# Altium PCB USB_Board.PcbDoc
Units mm, origin at the board's own origin, x right, y up, seen from the top; angles counter-clockwise.
Board outline 20.1 x 44.5 mm, 2 copper layers (Top Layer, Bottom Layer); 29 components, 34 nets, 179 pads, 17 vias.
Unrouted connection lines stored in the file: 1.
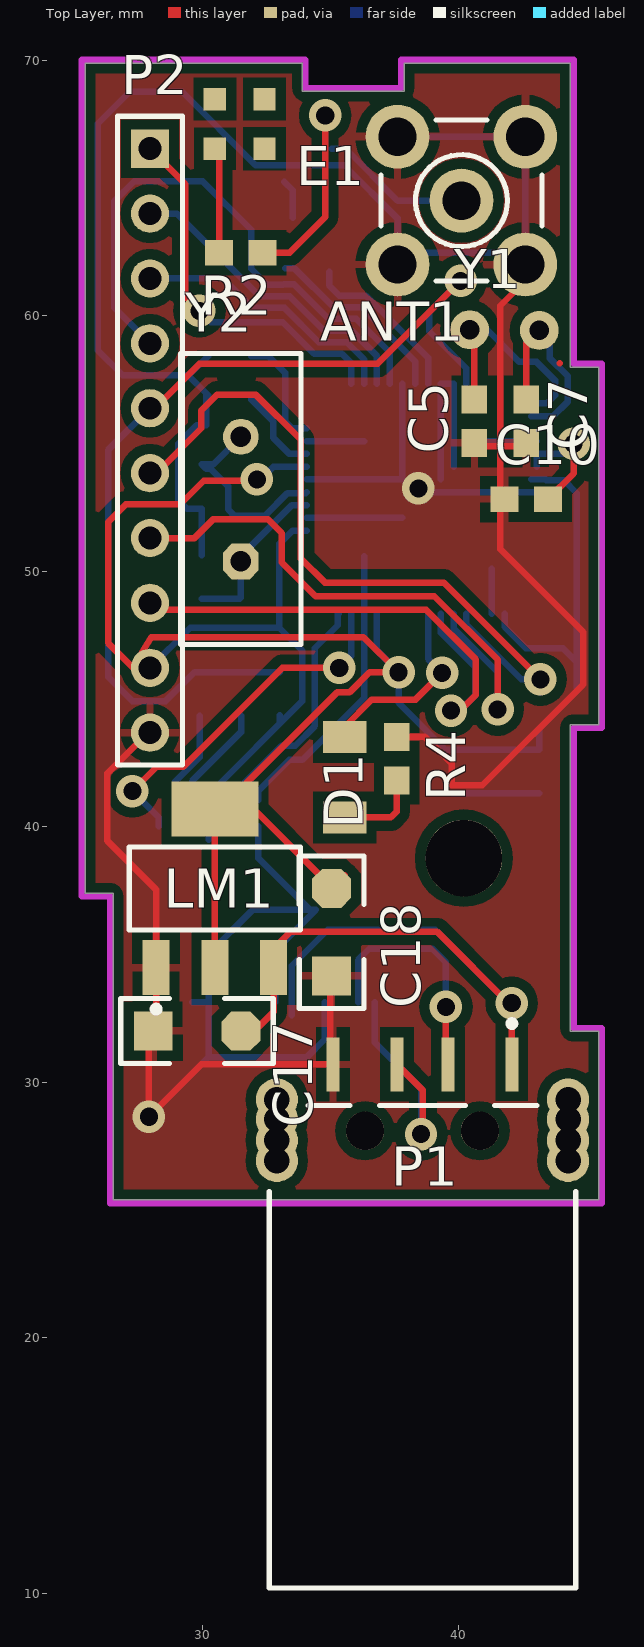
[diagram p0: Top Layer view]
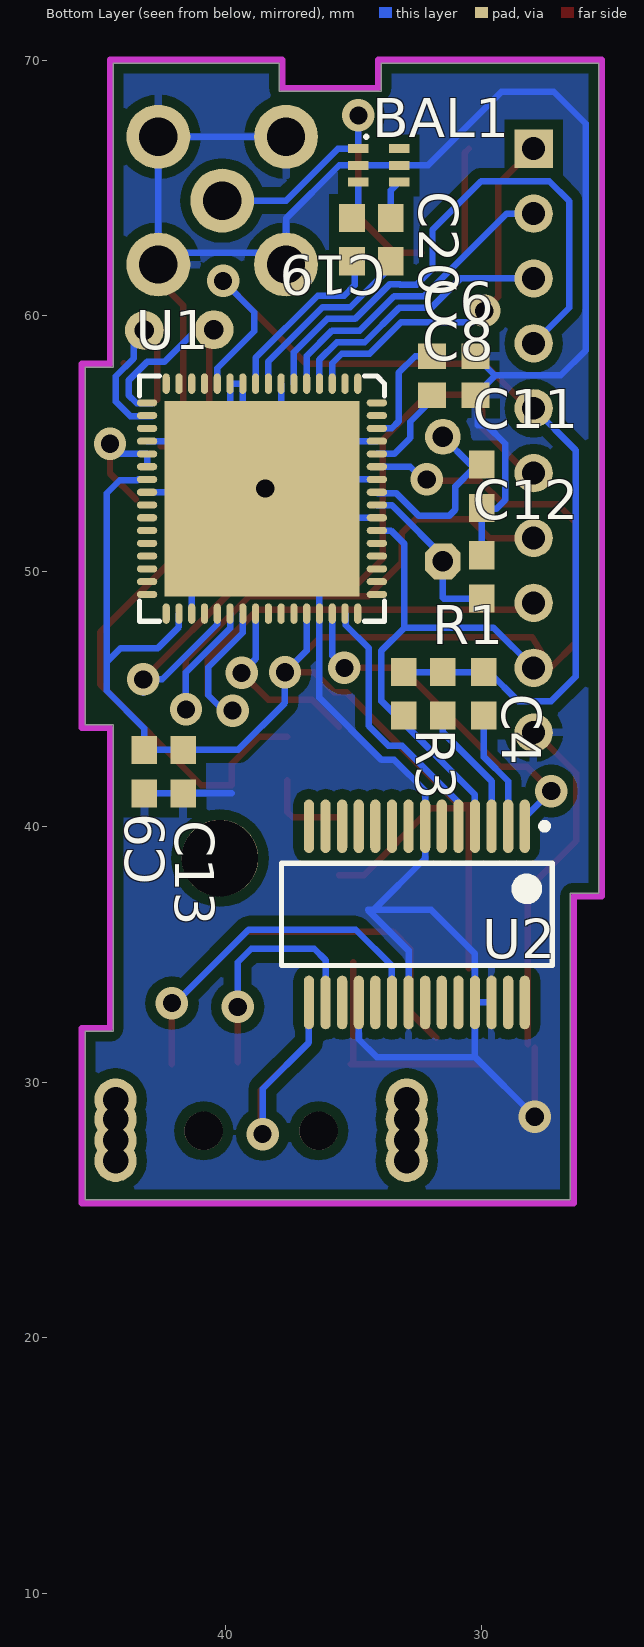
[diagram p1: Bottom Layer view, seen from below]

## Layer stack, top to bottom
Top Layer: signal copper 0.0356
Dielectric: dielectric 0.32, FR-4, Dk 4.8
Bottom Layer: signal copper 0.0356

## Board outline
26.5,25.4 45.5,25.4 45.5,32 44.4,32 44.4,44 45.5,44 45.5,58 44.4,58 44.4,69.9 37.9,69.9 37.9,68.8 33.9,68.8 33.9,69.9 25.4,69.9 25.4,37.4 26.5,37.4

## Design rules (kind name [scope] priority, off if disabled: settings)
Clearance polygon [inpolygon] p1: gap=0.4
Clearance [All] p2: gap=0.2
ComponentClearance [All] p1 off: gap=0.254 collisioncheckmode=3 verticalgap=0.254 showdistances=FALSE
HoleSize [All] p1 off: absolutevalues=TRUE maxlimit=2.54 minlimit=0.025 maxpercent=80.000 minpercent=20.000
MinimumSolderMaskSliver [All] p1 off: minsoldermaskwidth=0.254
PolygonConnect PolygonConnect_1 [isVia] p1: connectstyle=Direct reliefconductorwidth=0.254 reliefentries=4 polygonreliefangle="90 Angle"
PolygonConnect [All] p2: connectstyle=Relief reliefconductorwidth=0.3 reliefentries=4 polygonreliefangle="90 Angle"
RoutingVias [All] p1: holewidth=0.6 width=1 viastyle="Through Hole" minholewidth=0.711 minwidth=1.27 maxholewidth=0.711 maxwidth=1.27
SilkToSilkClearance [All] p1 off: silktosilkclearance=0.254
SilkscreenOverComponentPads [All] p1 off: minsilkscreentomaskgap=0.254
SolderMaskExpansion [All] p1: expansion=0.102
UnRoutedNet [All] p1 off:
Width [All] p1: maxlimit=0.3 minlimit=0.2 preferedwidth=0.2
22 further rules are at their usual default settings.

## Components (designator, comment, footprint, x,y, rotation, side; value= is the part's Value field where it differs from the comment)
ANT1 "SMB" SMB_V-RJ45 40.132,64.516 r0 top
BAL1 "2.45 GHz" BALUN_SMD 34.8,66.548 r90 bottom
C4 "Cap" 1608[0603] 29.885,45.208 r90 bottom
C5 "Cap" 1608[0603] 40.64,55.88 r270 top
C6 "Cap" 1608[0603] 31.064,58.426 r180 bottom
C7 "Cap" 1608[0603] 42.672,55.88 r270 top
C8 "Cap" 1608[0603] 31.064,56.902 r180 bottom
C9 "Cap" 1608[0603] 43.18,42.164 r270 bottom
C10 "Cap" 1608[0603] 42.672,52.832 r0 top
C11 "Cap" 1608[0603] 29.972,53.34 r90 bottom
C12 "Cap" 1608[0603] 29.972,49.784 r270 bottom
C13 "Cap" 1608[0603] 41.656,42.164 r270 bottom
C17 "Cap Pol1" Minitantalo 31.496,32.004 r270 top
C18 "Cap Pol1" Minitantalo 35.052,37.592 r0 top
C19 "Cap" 1608[0603] 35.052,62.992 r90 bottom
C20 "Cap" 1608[0603] 33.528,62.992 r90 bottom
D1 "TX" 3015[1206] 35.56,43.522 r270 top
E1 "Antenna" "Antennas 2.4G SMD MOLEX" 30.48,66.548 r0 top
LM1 "LM1117" LM1117 30.48,37.592 r180 top
P1 "USB Type A" USBA_SMD 38.608,25.4 r270 top locked
P2 "Header 10" HDR1X10 27.94,66.548 r270 top
R1 "Res2" 1608[0603] 33.02,45.212 r270 bottom
R2 "Res2" 1608[0603] 31.496,62.484 r0 top
R3 "Res2" 1608[0603] 31.505,45.208 r270 bottom
R4 "Res2" 1608[0603] 37.592,42.672 r90 top
U1 "ATmega128RFA1-DE" MLF64-M2 38.575,52.85 r90 bottom
U2 "IC_FT232RL" SSOP-28 32.512,36.576 r270 bottom
Y1 "32.768KHz" Crystal 43.18,59.436 r180 top
Y2 "16MHz" BCY-W2/E4.7 31.496,52.832 r90 top

## Footprints (in the part's own frame and the unit in brackets; to place one, negate y for a bottom-side part, rotate by r counter-clockwise, add the part's x,y. Pads: shape width x height; smd on the part's side, far side on the other; paste and mask are expansions set on the pad)
1608[0603] [mm] "Chip Capacitor; Body 1.6 x 0.8 mm (LxW typ)"
  rect 1.1x1 smd: 1(-0.85,0) 2(0.85,0)
  body extent -1,-0.5 0.9,0.5, height 1.3
3015[1206] [mm] "Chip Capacitor; Body 3.0 x 1.5 mm (LxW typ)"
  rect 1.25x1.7 smd: 1(0,0) 2(3.15,0)
  body extent 0,-0.9 3.15,0.9, height 1.3
"Antennas 2.4G SMD MOLEX" [mm]
  rect 0.87x0.87 smd mask+0.335: 1(0,0) ""(0,1.94) ""(1.94,0) ""(1.94,1.94)
BALUN_SMD [mm] "Harmonic Filter-Balun; Body 2.0 x 1.25 mm"
  rect 0.35x0.8 smd: 1(0,0) 2(-0.65,0) 3(-1.3,0) 4(-1.3,-1.6) 5(-0.65,-1.6) 6(0,-1.6)
  silkscreen extent 0.48,-0.3 0.48,-0.3, body extent -1.65,-1.43 0.35,-0.18, height 0.8
BCY-W2/E4.7 [mm] "Quartz Crystal, Thru-Hole; 2 Leads; Body 11.35 x 4.65 x 13.46 mm (LxWxH max)"
  oct 1.4x1.4 hole 0.8: 1(-2.44,0)
  round 1.4 hole 0.8: 2(2.44,0)
  silkscreen extent -5.7,-2.35 5.7,2.35
Crystal [mil]
  round 60 hole 30: 1(0,0) 2(107.28,-0.98)
HDR1X10 [mm] "Connector; Header; 10 Position"
  rect 1.5x1.5 hole 0.9: 1(0,0)
  round 1.5 hole 0.9: 2(2.54,0) 3(5.08,0) 4(7.62,0) 5(10.16,0) 6(12.7,0) 7(15.24,0) 8(17.78,0) 9(20.32,0) 10(22.86,0)
  silkscreen extent -1.27,-1.27 24.13,1.27
LM1117 [mm]
  rect 1.05x2.15 smd: 1(2.3,3.1) 2(0,3.1) 3(-2.3,3.1)
  rect 3.4x2.15 smd: 2(0,-3.1)
  silkscreen extent -3.35,-1.62 3.35,4.85
Minitantalo [mil]
  oct 60x60 smd: 1(0,0)
  rect 60x60 smd: 2(0,-135)
  silkscreen extent -50,-185 50,50
MLF64-M2 [mm]
  oval 0.8x0.28 smd paste-0.03 mask+0: 1(4.5,-3.75) 2(4.5,-3.25) 3(4.5,-2.75) 4(4.5,-2.25) 5(4.5,-1.75) 6(4.5,-1.25) 7(4.5,-0.75) 8(4.5,-0.25) 9(4.5,0.25) 10(4.5,0.75) 11(4.5,1.25) 12(4.5,1.75) 13(4.5,2.25) 14(4.5,2.75) 15(4.5,3.25) 16(4.5,3.75) 33(-4.5,3.75) 34(-4.5,3.25) 35(-4.5,2.75) 36(-4.5,2.25) 37(-4.5,1.75) 38(-4.5,1.25) 39(-4.5,0.75) 40(-4.5,0.25) 41(-4.5,-0.25) 42(-4.5,-0.75) 43(-4.5,-1.25) 44(-4.5,-1.75) 45(-4.5,-2.25) 46(-4.5,-2.75) 47(-4.5,-3.25) 48(-4.5,-3.75)
  oval 0.28x0.8 smd paste-0.03 mask+0: 17(3.75,4.5) 18(3.25,4.5) 19(2.75,4.5) 20(2.25,4.5) 21(1.75,4.5) 22(1.25,4.5) 23(0.75,4.5) 24(0.25,4.5) 25(-0.25,4.5) 26(-0.75,4.5) 27(-1.25,4.5) 28(-1.75,4.5) 29(-2.25,4.5) 30(-2.75,4.5) 31(-3.25,4.5) 32(-3.75,4.5) 49(-3.75,-4.5) 50(-3.25,-4.5) 51(-2.75,-4.5) 52(-2.25,-4.5) 53(-1.75,-4.5) 54(-1.25,-4.5) 55(-0.75,-4.5) 56(-0.25,-4.5) 57(0.25,-4.5) 58(0.75,-4.5) 59(1.25,-4.5) 60(1.75,-4.5) 61(2.25,-4.5) 62(2.75,-4.5) 63(3.25,-4.5) 64(3.75,-4.5)
  rect 7.65x7.65 smd paste-2.8 mask+0: 65(0,0)
  silkscreen extent -4.8,-4.8 4.8,4.8
SMB_V-RJ45 [mm] "Connector; SMB Straight"
  round 2.5 hole 1.5: 1(0,0) 2(-2.5,-2.5) 2(-2.5,2.5) 2(2.5,-2.5) 2(2.5,2.5)
  silkscreen extent -3.15,-3.15 3.15,3.15
SSOP-28 [mm] "28-Pin SSOP 0.65 mm Pitch"
  oval 2.1x0.4 smd: 1(-3.45,4.225) 2(-3.45,3.575) 3(-3.45,2.925) 4(-3.45,2.275) 5(-3.45,1.625) 6(-3.45,0.975) 7(-3.45,0.325) 8(-3.45,-0.325) 9(-3.45,-0.975) 10(-3.45,-1.625) 11(-3.45,-2.275) 12(-3.45,-2.925) 13(-3.45,-3.575) 14(-3.45,-4.225) 15(3.45,-4.225) 16(3.45,-3.575) 17(3.45,-2.925) 18(3.45,-2.275) 19(3.45,-1.625) 20(3.45,-0.975) 21(3.45,-0.325) 22(3.45,0.325) 23(3.45,0.975) 24(3.45,1.625) 25(3.45,2.275) 26(3.45,2.925) 27(3.45,3.575) 28(3.45,4.225)
  silkscreen extent -3.57,-5.3 2,5.3, body extent -2.7,-5.3 2.7,5.3, height 2
USBA_SMD [mm]
  rect 2.1x0.5 smd: 1(-5.3,3.5) 2(-5.3,1) 3(-5.3,-1) 4(-5.3,-3.5)
  round 1.65 hole 1: 5(-3.925,5.7) 5(-3.925,-5.7) 5(-3.15,5.7) 5(-3.15,-5.7) 5(-2.325,5.7) 5(-2.325,-5.7) 5(-1.525,5.7) 5(-1.525,-5.7)
  round 1.5 hole 1.5: MH1(-2.7,-2.25) MH2(-2.7,2.25)
  silkscreen extent -7.02,-6 15.2,6, body extent -3.7,-6 15.2,6, height 4.5

## Part data
ANT1: "SMB Straight Connector"
BAL1: library part BALUN
C4 C5 C6 C7 C8 C9 C10 C11 C12 C13 C19 C20: "Capacitor"
C17 C18: "Polarized Capacitor (Radial)"
D1: library part "LED SMD (0603)"
E1: "Generic Antenna"
LM1: library part "Volt Reg", "Voltage Regulator"
P1: library part "Header 4", "Header, 4-Pin"
P2: "Header, 10-Pin"
R1 R2 R3 R4: "Resistor"
U1: "802.15.4 compliant AVR transceiver"
U2: "FT232R USB UART"
Y1 Y2: library part XTAL, "Crystal Oscillator"

## Free pads (board coordinates)
  round 3 hole 3: ""(40.225,38.775)

## Via types
v1: diameter 1.27, hole 0.711, Top Layer to Bottom Layer, 17 vias

## Nets (pads, with @x,y where several pads share a name; then routed paths per layer and width w, separated by ;. In a path a pad name is that pad's centre, name@x,y a point inside that pad or via, vN(x,y) a via of type N, cw(c..) or ccw(c..) an arc to the next point about the centre after c; other vN are vias at no path point)
CTS: U2.11
D+: P1.3 U2.15 | length 9.1
  Top Layer w0.254: P1.3 38.625,29.683 38.625,28.05 v1(38.55,27.975)
  Bottom Layer w0.254: U2.15 36.737,31.563 38.55,29.75 v1(38.55,27.975)
D-: P1.2 U2.16 | length 9.4
  Top Layer w0.254: P1.2@39.525,30.783 v1(39.525,32.95)
  Bottom Layer w0.254: U2.16 36.087,34.787 36.525,35.225 39,35.225 39.525,34.7 v1(39.525,32.95)
DTR: C4.1 U2.2 | length 4.7
  Bottom Layer w0.254: U2.2 28.937,41.787 29.885,42.735 C4.1
GND: ANT1.2 BAL1.2 BAL1.5 C5.2 C6.2 C7.2 C8.2 C9.2 C10.1 C11.1 C12.1 C13.2 C17.2 C18.2 LM1.1 P1.4 P2.10 R4.2 U1.7 U1.10 U1.11 U1.20 U1.24 U1.35 U1.45 U1.55 U1.58 U1.61 U1.65 U2.7 U2.18 U2.21 U2.25 U2.26 | length 183.9
  Top Layer w0.254: C17.2@27.9,31.35 v1(27.9,28.65) 29.95,30.7 P1.4 ; P2.10 27.863,43.688 26.275,42.1 26.275,39.45 28.18,37.545 LM1.1 C17.2@28.18,31.496 ; P1.4@35.002,30.806 C18.2@35.002,34.696 ; R4.2 38.703,43.522 39.75,42.475 39.75,41.625 40.95,41.625 44.9,45.575 44.9,47.625 41.65,50.875 41.65,54.893 ; C5.2@40.777,54.893 41.65,54.893 ; C7.2@42.535,54.893 41.65,54.893 ; ANT1.2@42.632,62.016 42.632,61.382 41.65,60.4 41.65,54.893
  Bottom Layer w0.254: v1(27.9,28.65) 30.237,30.987 ; U2.26 U2.25 ; C12.1 29.972,52.447 29.403,52.447 29.05,52.8 29.05,55 29.764,55.714 30.138,55.714 C8.2@30.138,56.978 ; C8.2 C8.2@30.138,56.978 ; C6.2 29.463,57.675 ; U2.7 32.187,38.775 34.212,36.75 ; U2.7@32.187,41.05 32.187,41.412 33.397,42.622 33.897,42.622 36.325,45.05 U1.45 U1.65@36.325,50.6 ; U2.21 32.837,35.162 34.425,36.75 34.212,36.75 ; U1.55 U1.65@37.825,52.1 ; U1.58 37.825,53.6 U1.7 ; U1.61 U1.65@36.325,55.1 ; U2.18 34.787,31.687 34.087,30.987 30.237,30.987 ; ANT1.2@37.632,67.016 42.632,67.016 42.632,62.475 38.091,62.475 37.632,62.016 37.632,63.818 35.55,65.9 32.075,65.9 29.2,68.775 27.15,68.775 25.9,67.525 25.9,58.65 26.875,57.675 29.463,57.675 ; U1.65@38.825,53.1 U1.24 ; U1.65@39.325,53.6 U1.10 U1.11 U1.65@39.825,54.1 ; 39.75,41.314 C13.2 C9.2 ; U1.65@40.825,55.1 U1.20 ; U1.35 U1.65@41.325,50.1 ; 29.463,57.675 29.452,57.664 C8.2@30.138,56.978 ; 30.237,30.987 U2.25 ; U2.25 30.237,35.037 31.95,36.75 34.212,36.75
  other v1: 38.45,53.25
MISO: P2.8 U1.39 | length 20.9
  Top Layer w0.254: P2.8 28.208,48.5 38.75,48.5 40.7,46.55 40.7,45.175 v1@40.075,44.55
  Bottom Layer w0.254: U1.39 39.325,47.6 40.675,46.25 40.675,45.15 40.075,44.55 v1(39.725,44.55)
MOSI: P2.7 U1.38 | length 22.8
  Top Layer w0.254: P2.7 29.683,51.308 30.425,52.05 32.55,52.05 33.1,51.5 33.1,50.35 34.421,49.029 39.071,49.029 41.55,46.55 v1@41.55,45.1
  Bottom Layer w0.254: U1.38 39.825,47.775 41.55,46.05 v1(41.55,44.6)
NC: U2.8 U2.24
NetANT1_1: ANT1.1 BAL1.1 R2.2 | length 14.2
  Top Layer w0.254: R2.2 33.409,62.484 34.8,63.875 v1(34.8,67.85)
  Bottom Layer w0.254: BAL1.1 v1(34.8,67.85) ; BAL1.1@35.052,66.55 35.6,66.55 37.634,64.516 ANT1.1
NetBAL1_3: BAL1.3 C19.2 | length 1.2
  Bottom Layer w0.254: C19.2@34.8,64.094 BAL1.3
NetBAL1_4: BAL1.4 C20.2 | length 1.5
  Bottom Layer w0.254: BAL1.4 33.528,64.92 C20.2
NetC5_1: C5.1 U1.17 Y1.2 | length 8.6
  Top Layer w0.254: Y1.2 40.64,59.276 C5.1
  Bottom Layer w0.254: Y1.2 41.139,59.461 42.4,58.2 43.075,58.2 43.8,57.475 43.8,56.9 43.482,56.582 U1.17@42.875,56.582
NetC6_1: C6.1 U1.62 | length 4.4
  Bottom Layer w0.254: C6.1 32.578,58.426 33.229,57.775 33.229,55.871 33.5,55.6 U1.62
NetC7_1: C7.1 U1.18 Y1.1 | length 7.5
  Top Layer w0.254: C7.1 42.672,58.928 Y1.1
  Bottom Layer w0.254: U1.18@42.875,56.082 43.732,56.082 44.3,56.65 44.3,57.636 43.597,58.339 43.597,58.928 Y1.1@43.206,58.928
NetC8_1: C8.1 U1.60 | length 3.6
  Bottom Layer w0.254: C8.1 31.914,56.723 32.775,55.862 32.775,55.225 33.4,54.6 U1.60
NetC10_2: C10.2 U1.21 U1.22 | length 4.1
  Top Layer w0.254: C10.2 44.525,53.835 v1(44.525,55)
  Bottom Layer w0.254: U1.22 U1.21 v1@44.125,54.6
NetC11_2: C11.2 U1.57 Y2.2 | length 7.8
  Bottom Layer w0.254: Y2.2 30.414,54.19 C11.2 30.137,54.025 30.3,54.025 31,53.325 31,52.425 31.251,52.174 32.432,52.174 33.325,53.067 34.042,53.067 U1.57
NetC12_2: C12.2 U1.56 Y2.1 | length 6.7
  Bottom Layer w0.254: C12.2 31.459,48.934 31.496,48.971 Y2.1 ; Y2.1@31.292,50.392 33.5,52.6 U1.56
NetC19_1: C19.1 U1.9 | length 6.6
  Bottom Layer w0.254: C19.1@34.95,61.736 34.95,61.2 35.359,60.791 36.394,60.791 38.825,58.36 U1.9
NetC20_1: C20.1 U1.8 | length 7.5
  Bottom Layer w0.254: C20.1@33.238,61.862 33.597,61.862 35.122,60.337 36.206,60.337 38.325,58.218 U1.8
NetD1_1: D1.1 U1.40 | length 7.2
  Top Layer w0.254: D1.1@35.56,43.92 36.625,44.985 38.335,44.985 v1(39.375,46.025)
  Bottom Layer w0.254: U1.40 38.825,46.575 v1(39.375,46.025)
NetD1_2: D1.2 R4.1 | length 3.4
  Top Layer w0.254: D1.2 37.372,40.372 37.592,40.592 R4.1
NetE1_1: E1.1 R2.1 | length 4.1
  Top Layer w0.254: E1.1 30.646,66.382 R2.1
RESET: C4.2 P2.5 R1.1 R3.1 U1.12 | length 38.1
  Top Layer w0.254: P2.5 28.138,56.388 29.875,58.125 36.85,58.125 v1(40.1,61.375)
  Bottom Layer w0.254: P2.5 27.938,56.388 26.3,54.75 26.3,45.875 27.25,44.925 28.55,44.925 29.683,46.058 C4.2 R3.1 33.016,46.058 R1.1 ; v1(40.1,61.375) 38.875,60.15 38.875,59.4 40.325,57.95 U1.12
RTS: R3.2 U2.3 | length 4.6
  Bottom Layer w0.254: U2.3@29.587,40.582 29.587,41.795 31.505,43.713 R3.2
RXI: U1.46 U2.1 | length 14.2
  Top Layer w0.254: v1(27.25,41.4) 28.2,42.35 29.25,42.35 33.125,46.225 v1(35.35,46.225)
  Bottom Layer w0.254: v1(27.25,41.4) 28.287,40.363 U2.1 ; v1(35.35,46.225) 35.825,46.7 U1.46
SCK: P2.6 U1.37 | length 29
  Top Layer w0.254: P2.6 28.198,53.848 29.95,55.6 29.95,56.3 30.575,56.925 32.075,56.925 33.85,55.15 33.85,50.5 34.787,49.563 39.437,49.563 v1(43.225,45.775)
  Bottom Layer w0.254: U1.37 40.325,47.93 42.48,45.775 v1(43.225,45.775) v1@43.225,45.25
TCK: P2.1 U1.3 | length 14.1
  Top Layer w0.254: P2.1 29.325,65.163 29.325,60.75 v1(29.875,60.2)
  Bottom Layer w0.254: 30.325,59.75 33.133,59.75 34.362,58.521 35.454,58.521 35.825,58.15 U1.3
TDI: P2.4 U1.6 | length 22.2
  Bottom Layer w0.254: P2.4 26.55,60.318 26.55,64.5 27.325,65.275 30,65.275 31.9,63.375 31.9,61.85 32.525,61.225 33.166,61.225 33.191,61.25 33.567,61.25 34.934,59.883 36.018,59.883 37.325,58.576 U1.6
TDO: P2.2 U1.5 | length 12.3
  Bottom Layer w0.254: P2.2 28.992,64.008 32.229,60.771 33.404,60.771 34.746,59.429 35.83,59.429 36.825,58.434 U1.5
TMS: P2.3 U1.4 | length 10.6
  Bottom Layer w0.254: P2.3 30.806,61.468 31.957,60.317 33.208,60.317 34.55,58.975 35.642,58.975 36.325,58.292 U1.4
TXO: U1.47 U2.5 | length 10.5
  Bottom Layer w0.254: U2.5 30.887,40.971 33.091,43.175 33.625,43.175 34.4,43.95 34.4,45.815 34.388,45.827 34.388,46.993 35.292,47.897 35.292,48.317 U1.47
VBUS: C17.1 LM1.3 P1.1 U2.20 | length 29.3
  Top Layer w0.254: C17.1@31.763,31.737 32.78,32.755 LM1.3 32.78,35.23 33.45,35.9 39.175,35.9 v1@42.038,33.038 ; P1.1 v1@42.108,33.1
  Bottom Layer w0.254: U2.20@33.487,32.618 U2.20 33.487,34.562 34.9,35.975 39.1,35.975 v1@42.037,33.038
  other v1: 42.1,33.1
VCC: C9.1 C13.1 C18.1 LM1.2 P2.9 R1.2 U1.23 U1.34 U1.44 U1.54 U1.59 U2.4 | length 96.1
  Top Layer w0.254: LM1.2@30.365,40.84 30.84,40.84 35.263,45.263 35.748,45.263 36.535,46.05 v1(37.675,46.05) ; LM1.2@30.48,34.475 30.48,40.725 31.971,40.725 34.596,38.1 C18.1@35.56,38.1 ; v1@32.125,53.55 30.05,53.55 29.125,52.625 27,52.625 26.3,51.925 26.3,47.2 27.272,46.228 27.448,46.522 27.99,47.428 36.297,47.428 v1(37.675,46.05) ; v1@37.675,46.145 v1(37.675,46.05)
  Bottom Layer w0.254: P2.9 29.512,47.8 33,47.8 ; U2.4@30.237,39.487 U2.4 30.237,41.262 33.9,44.925 33.9,46.9 33,47.8 ; v1(32.125,53.6) 32.125,53.45 32.775,54.1 U1.59 ; R1.2@33.02,44.05 R1.2 ; U1.54 33.525,51.6 33,51.075 33,47.8 ; U1.44 36.825,46.9 v1(37.675,46.05) 37.675,44.85 39.5,43.025 C13.1@41.645,43.025 ; C13.1 C9.1 43.18,43.855 44.65,45.325 44.65,53.065 44.148,53.567 43.458,53.567 43.425,53.6 U1.23@42.875,53.6 ; U1.34 41.825,47.825 42.65,47 44.1,47 44.65,46.45
pads on no net: BAL1.6 E1. P1.5 P1.MH1 P1.MH2 U1.1 U1.2 U1.13 U1.14 U1.15 U1.16 U1.19 U1.25 U1.26 U1.27 U1.28 U1.29 U1.30 U1.31 U1.32 U1.33 U1.36 U1.41 U1.42 U1.43 U1.48 U1.49 U1.50 U1.51 U1.52 U1.53 U1.63 U1.64 U2.6 U2.9 U2.10 U2.12 U2.13 U2.14 U2.17 U2.19 U2.22 U2.23 U2.27 U2.28
copper on no net: | length 0

## Polygon pours and split planes (outlines as drawn)
GND on Bottom Layer "Bottom Layer-GND" (solid, remove dead copper, pour order 1001): 25.275,70 25.3,69.975 34.025,69.975 34.025,68.9 37.775,68.9 37.775,70.025 37.8,70 44.5,70 44.5,58.15 45.575,58.15 45.575,43.9 44.525,43.9 44.525,32.15 44.6,32.075 45.625,32.075 45.625,25.25 45.6,25.275 26.35,25.275 26.35,37.3 25.25,37.3 25.25,69.975 25.275,70
GND on Top Layer "Top Layer-No Net" (solid, remove dead copper, pour order 1000): 25.44,70.025 25.465,70.05 45.775,70.05 45.775,25.425 45.626,25.275 45.031,24.675 24.225,24.675 24.225,68.8 25.44,70.025

## Keep-outs
Keep-Out Layer:
  lines w0.254: 25.275,37.275 26.375,37.275 26.375,25.275 45.625,25.275 45.625,32.125 44.525,32.125 44.525,43.875 45.625,43.875 45.625,58.125 44.525,58.125 44.525,70.025 37.775,70.025 37.775,68.925 34.025,68.925 34.025,70.025 25.275,70.025 25.275,37.275

## Text inside footprints (layer, text, board x,y; h text height)
P1: Mechanical 1 "PCB Edge" at 33.435,24.927 h0.25